# Altium PCB PCB_new.PcbDoc (part 2 of 2)
Units mm, origin at the board's own origin, x right, y up, seen from the top; angles counter-clockwise.
Board outline 65.13 x 92.71 mm, 2 copper layers (Top Layer, Bottom Layer); 63 components, 54 nets, 264 pads, 73 vias.
Unrouted connection lines stored in the file: 34.
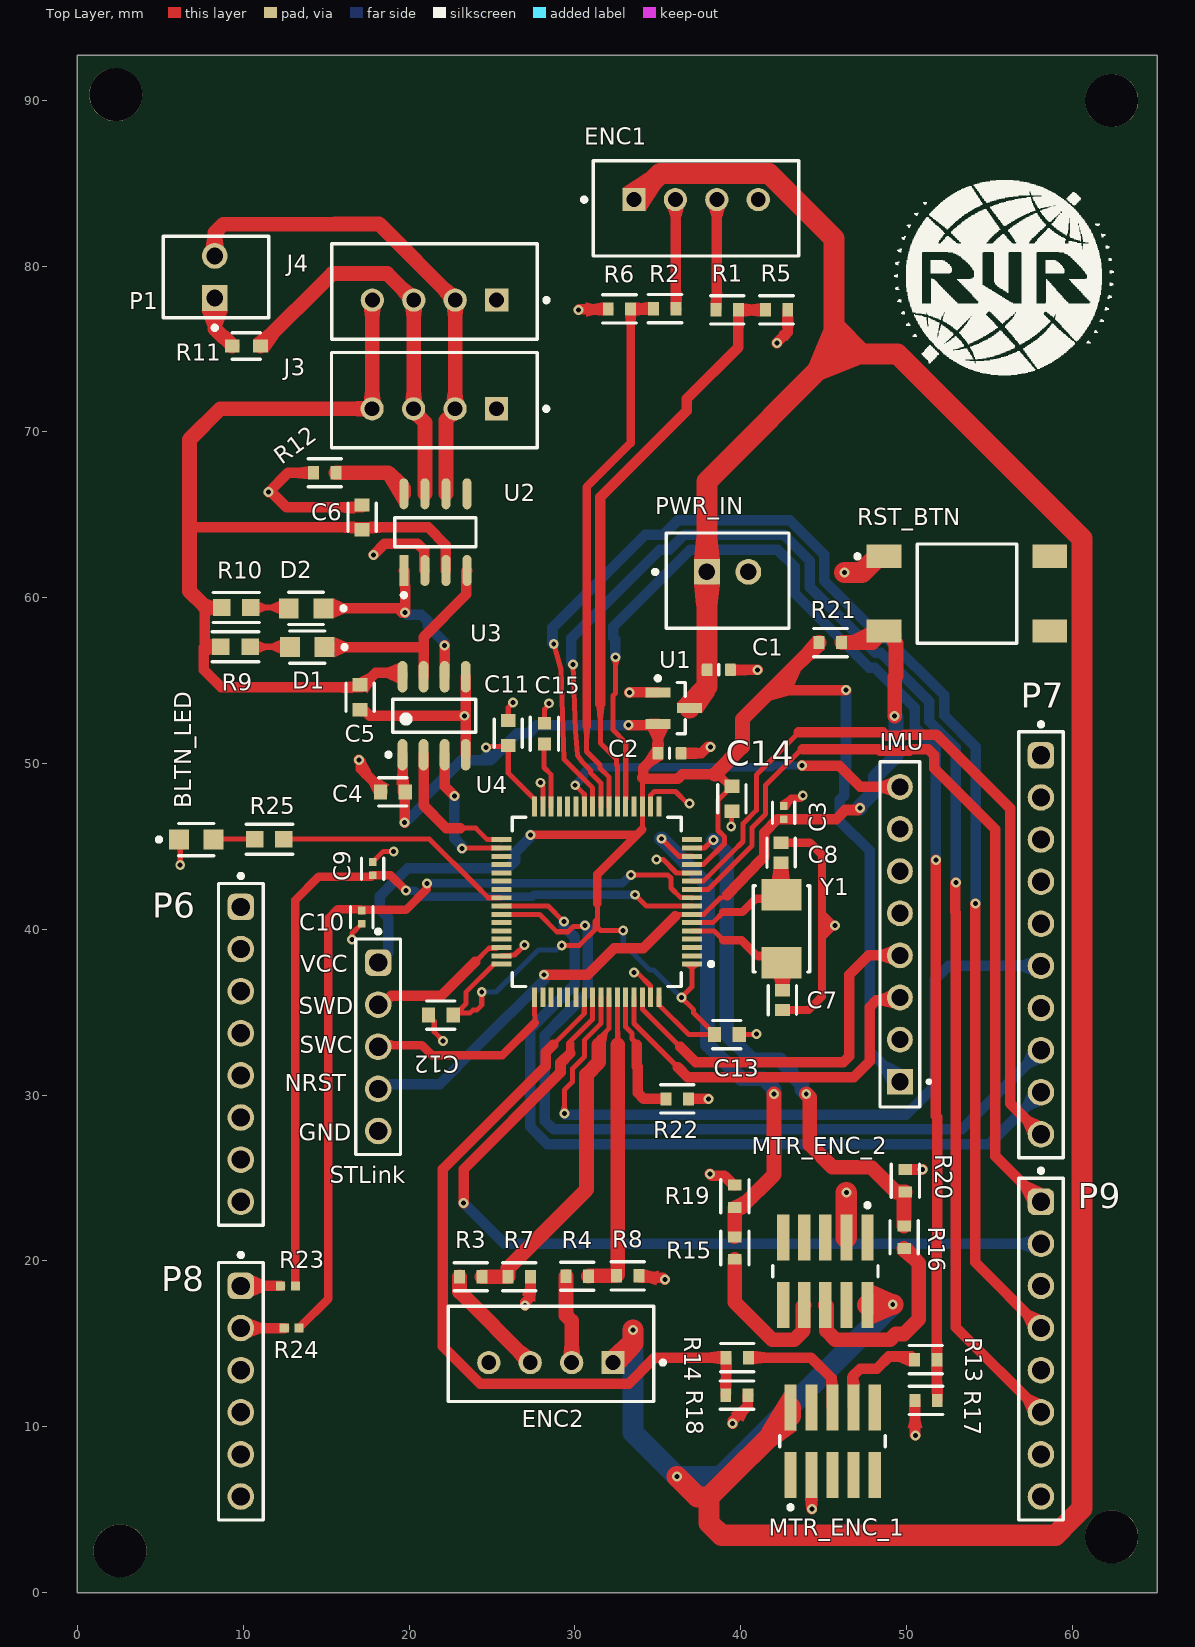
[diagram p0: Top Layer view]

## Via types
v1: diameter 0.6, hole 0.3, Top Layer to Bottom Layer, tented both sides, 73 vias

## Nets (pads, with @x,y where several pads share a name; then routed paths per layer and width w, separated by ;. In a path a pad name is that pad's centre, name@x,y a point inside that pad or via, vN(x,y) a via of type N, cw(c..) or ccw(c..) an arc to the next point about the centre after c; other vN are vias at no path point) (continued)
VCC-3V3: (continued)
  Top Layer w0.305: C12.1@22.747,34.823 22.747,34.897 22.798,34.948 C12.1@22.945,34.948 ; v1(24.384,36.22) 24.384,35.428 24.082,35.126 23.848,35.126 23.669,34.948 C12.1@22.945,34.948 ; v1(24.638,50.978) 24.694,51.034 25.927,51.034 C11.2 25.984,49.435 27.568,47.851 U4.32 ; U4.48@25.121,37.904 23.447,36.23 23.447,35.524 23.174,35.25 23.174,35.177 C12.1@22.945,34.948 ; v1(29.21,39.04) 30.269,39.04 31.212,39.983 31.212,40.484 31.363,40.635 ; 31.363,41.535 31.363,40.635 ; v1(32.918,39.929) 31.542,39.929 31.363,40.107 31.363,40.635 ; 34.068,46.032 U4.19 34.068,49.156 ; U4.64 35.068,35.461 36.874,33.655 C13.2 38.417,33.705 37.166,34.956 37.166,35.148 v1(36.424,35.89) 37.068,36.535 U4.1 ; U4.13 37.071,43.908 37.752,43.908 39.025,45.181 39.025,45.578 38.633,45.969 38.633,47.791 C14.1@39.422,48.579
  Top Layer w0.508: v1(27.33,45.695) 33.731,45.695 ; 31.363,41.535 31.363,43.326 33.731,45.695 ; 34.068,46.032 33.731,45.695 ; 38.456,49.352 38.649,49.352 C14.1@39.422,48.579
  Top Layer w0.635: U3.1 19.617,50.525 19.617,48.293 19.736,48.174 v1(19.736,46.444) ; v1(33.249,52.324) 34.525,52.324 34.591,52.39 U1.2 35.009,52.387 35.009,50.625 C2.1 34.112,49.722 34.112,49.2 34.068,49.156 34.126,49.098 36.22,49.098 36.474,49.352 38.456,49.352 ; 42.423,54.986 42.977,54.432 v1(46.355,54.432)
  Top Layer w0.889: 38.456,49.352 40.107,51.003 40.107,52.671 42.423,54.986 R21.2
  Bottom Layer w0.305: v1(24.384,36.22) 25.248,36.22 27.788,38.76 28.884,38.76 29.163,39.04 v1(29.21,39.04) ; v1(24.638,50.978) 24.694,50.921 24.694,50.384 24.892,50.186 ; v1(32.918,39.929) 32.918,39.153 34.521,37.55 34.764,37.55 v1(36.424,35.89)
  Bottom Layer w0.635: STLink.1 18.74,38.603 18.74,40.708 18.229,41.219 18.229,41.992 19.913,43.675 25.946,43.675 26.395,44.124 26.395,44.638 27.305,45.548 v1@27.305,45.72 ; v1(19.736,46.444) 19.971,46.679 20.009,46.679 20.903,47.573 20.903,47.933 23.156,50.186 24.892,50.186 26.522,51.816 27.203,51.816 27.711,52.324 v1(33.249,52.324) ; v1(46.355,54.432) 46.355,49.712 46.241,49.827 46.241,48.074 45.987,47.82 45.987,46.52 47.777,44.729 47.777,32.639 IMU.01
VCC-5V: C1.1 ENC1.1 ENC2.1 MTR_ENC_1.2 MTR_ENC_2.2 PWR_IN.1 U1.3 | length 190.5
  Top Layer w1.27: ENC2.1 33.503,15.062 v1(33.503,15.824) ; ENC1.1 35.152,85.604 41.721,85.604 45.644,81.681 45.644,74.701 ; v1(36.17,6.985) 37.398,5.756 38.1,5.756 ; U1.3 36.906,53.56 37.984,54.638 C1.1 37.968,55.668 PWR_IN.1 37.968,67.025 45.644,74.701 ; MTR_ENC_1.2 43.002,10.659 38.1,5.756 ; MTR_ENC_2.2 47.679,17.374 v1(49.174,17.374) ; 38.1,5.756 38.1,4.198 38.844,3.454 58.979,3.454 59.893,4.369 59.893,4.384 60.584,5.074 60.584,63.567 49.449,74.701 45.644,74.701
  Bottom Layer w1.27: v1(33.503,15.824) 33.503,9.652 v1(36.17,6.985) 38.786,6.985 v1(49.174,17.374)
pads on no net: IMU.05 IMU.06 MTR_ENC_1.1 MTR_ENC_1.4 MTR_ENC_1.5 MTR_ENC_1.7 MTR_ENC_1.9 MTR_ENC_1.10 MTR_ENC_2.1 MTR_ENC_2.4 MTR_ENC_2.5 MTR_ENC_2.7 MTR_ENC_2.9 MTR_ENC_2.10 P6.1 P6.2 P6.3 P6.4 P6.5 P6.8 P7.1 P7.2 P7.3 P7.5 P7.7 P8.3 P8.4 P8.5 P8.6 P9.3 P9.5 P9.7 P9.8 RST_BTN.2 RST_BTN.4 U2.5 U4.2 U4.3 U4.4 U4.16 U4.17 U4.20 U4.27 U4.28 U4.29 U4.35 U4.36 U4.37 U4.38 U4.39 U4.43 U4.44 U4.45 U4.50 U4.51 U4.52 U4.53 U4.54

## Polygon pours and split planes (outlines as drawn)
GND on Bottom Layer "GND_L02_P000" (solid, pour order 0): 4.394,86.868 5.131,86.131 5.131,3.937 59.487,3.937 61.57,6.02 61.57,70.333 42.951,88.951

## Silkscreen, mask and mechanical layers (free items; w line width, h text height)
Top Overlay:
  drawing of 33 lines, arcs and shapes, not listed
  text "VCC" at 13.437,37.414 h1.02
  text "SWD" at 13.36,34.874 h1.02
  text "SWC" at 13.411,32.537 h1.02
  text "NRST" at 12.497,30.226 h1.02
  text "GND" at 13.335,27.254 h1.02